# Altium PCB MachDoNuoc.PcbDoc
Units mil, origin at the board's own origin, x right, y up, seen from the top; angles counter-clockwise.
Board outline 3956.46 x 3078.74 mil, 2 copper layers (Top Layer, Bottom Layer); 15 components, 12 nets, 75 pads, 0 vias.
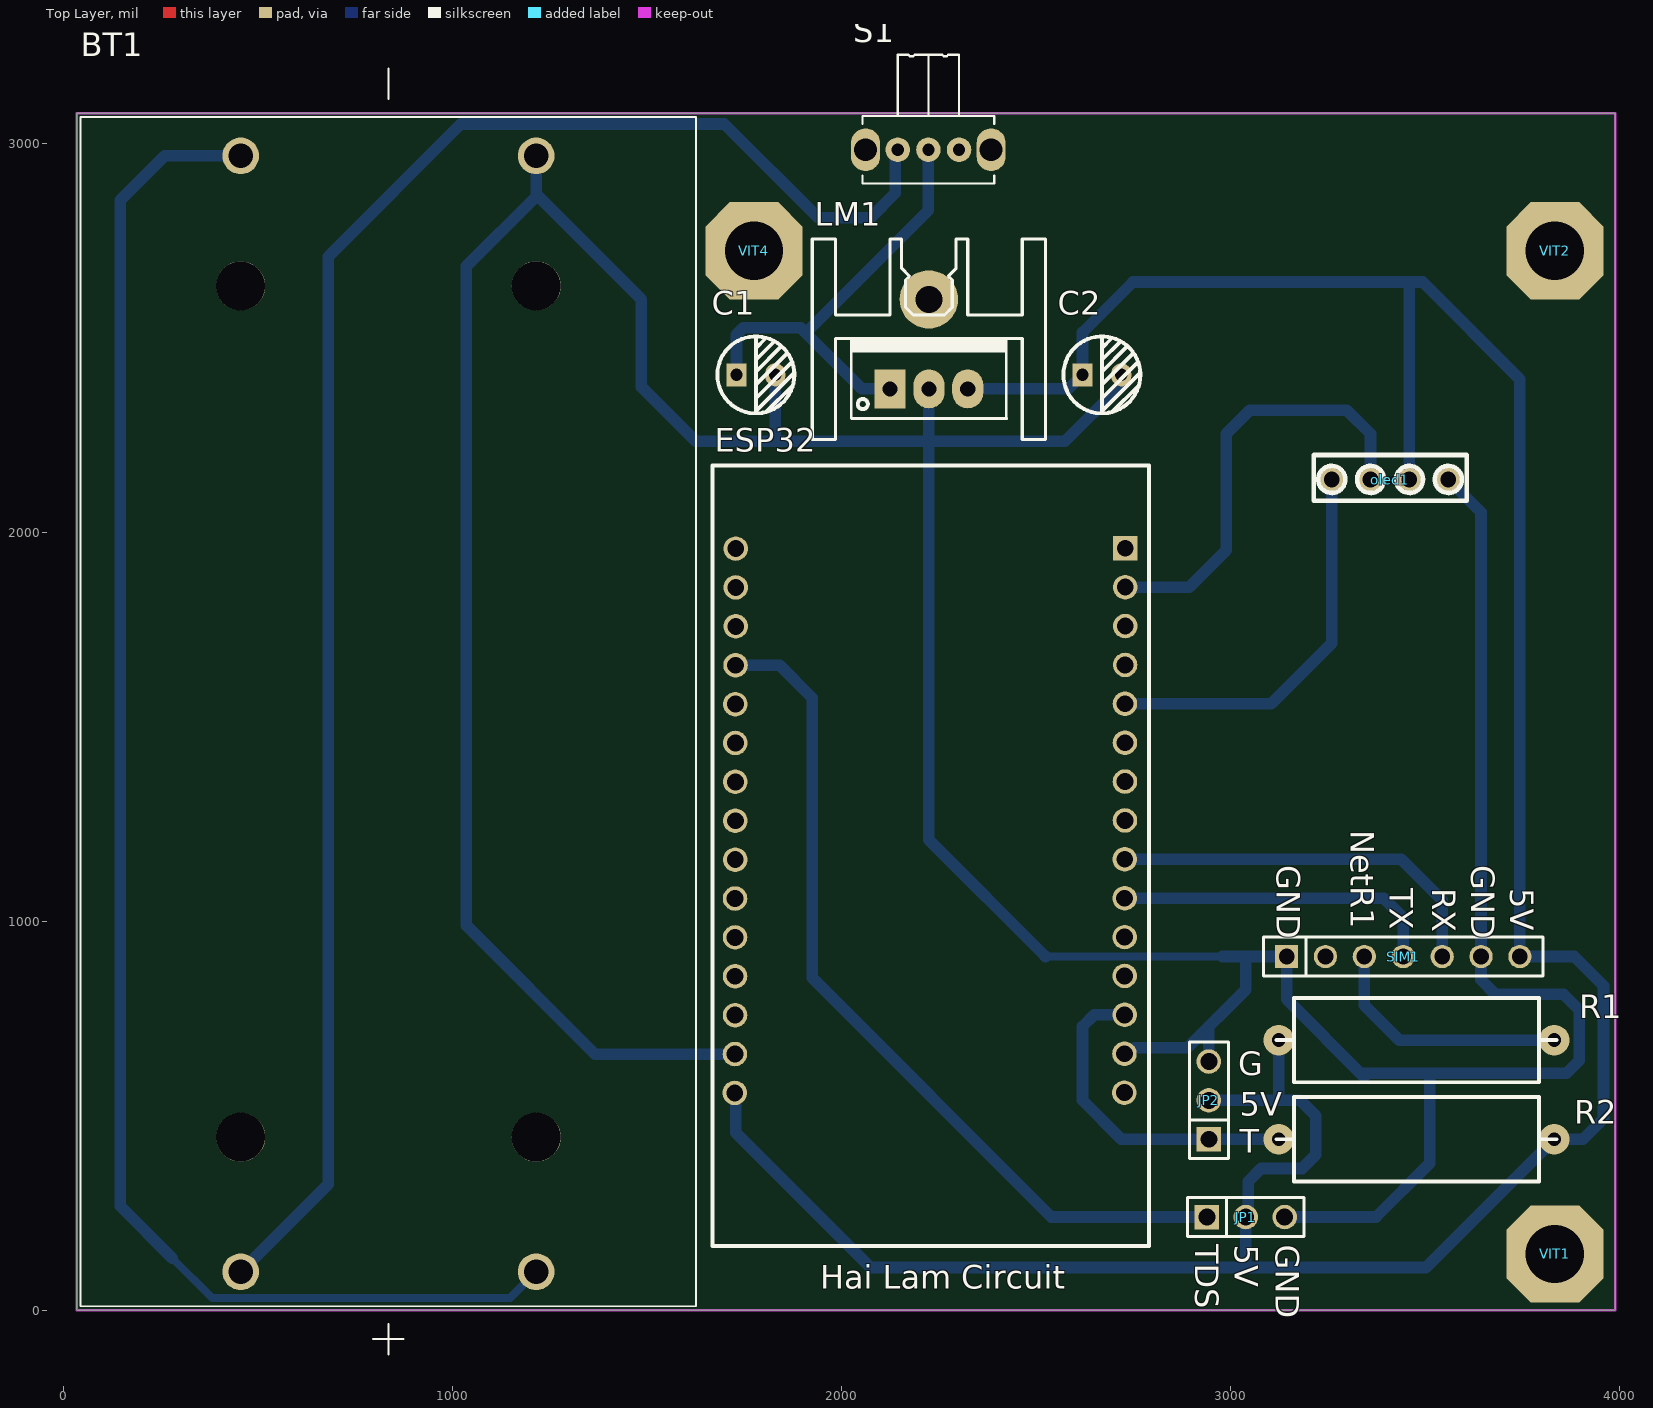
[diagram p0: Top Layer view]
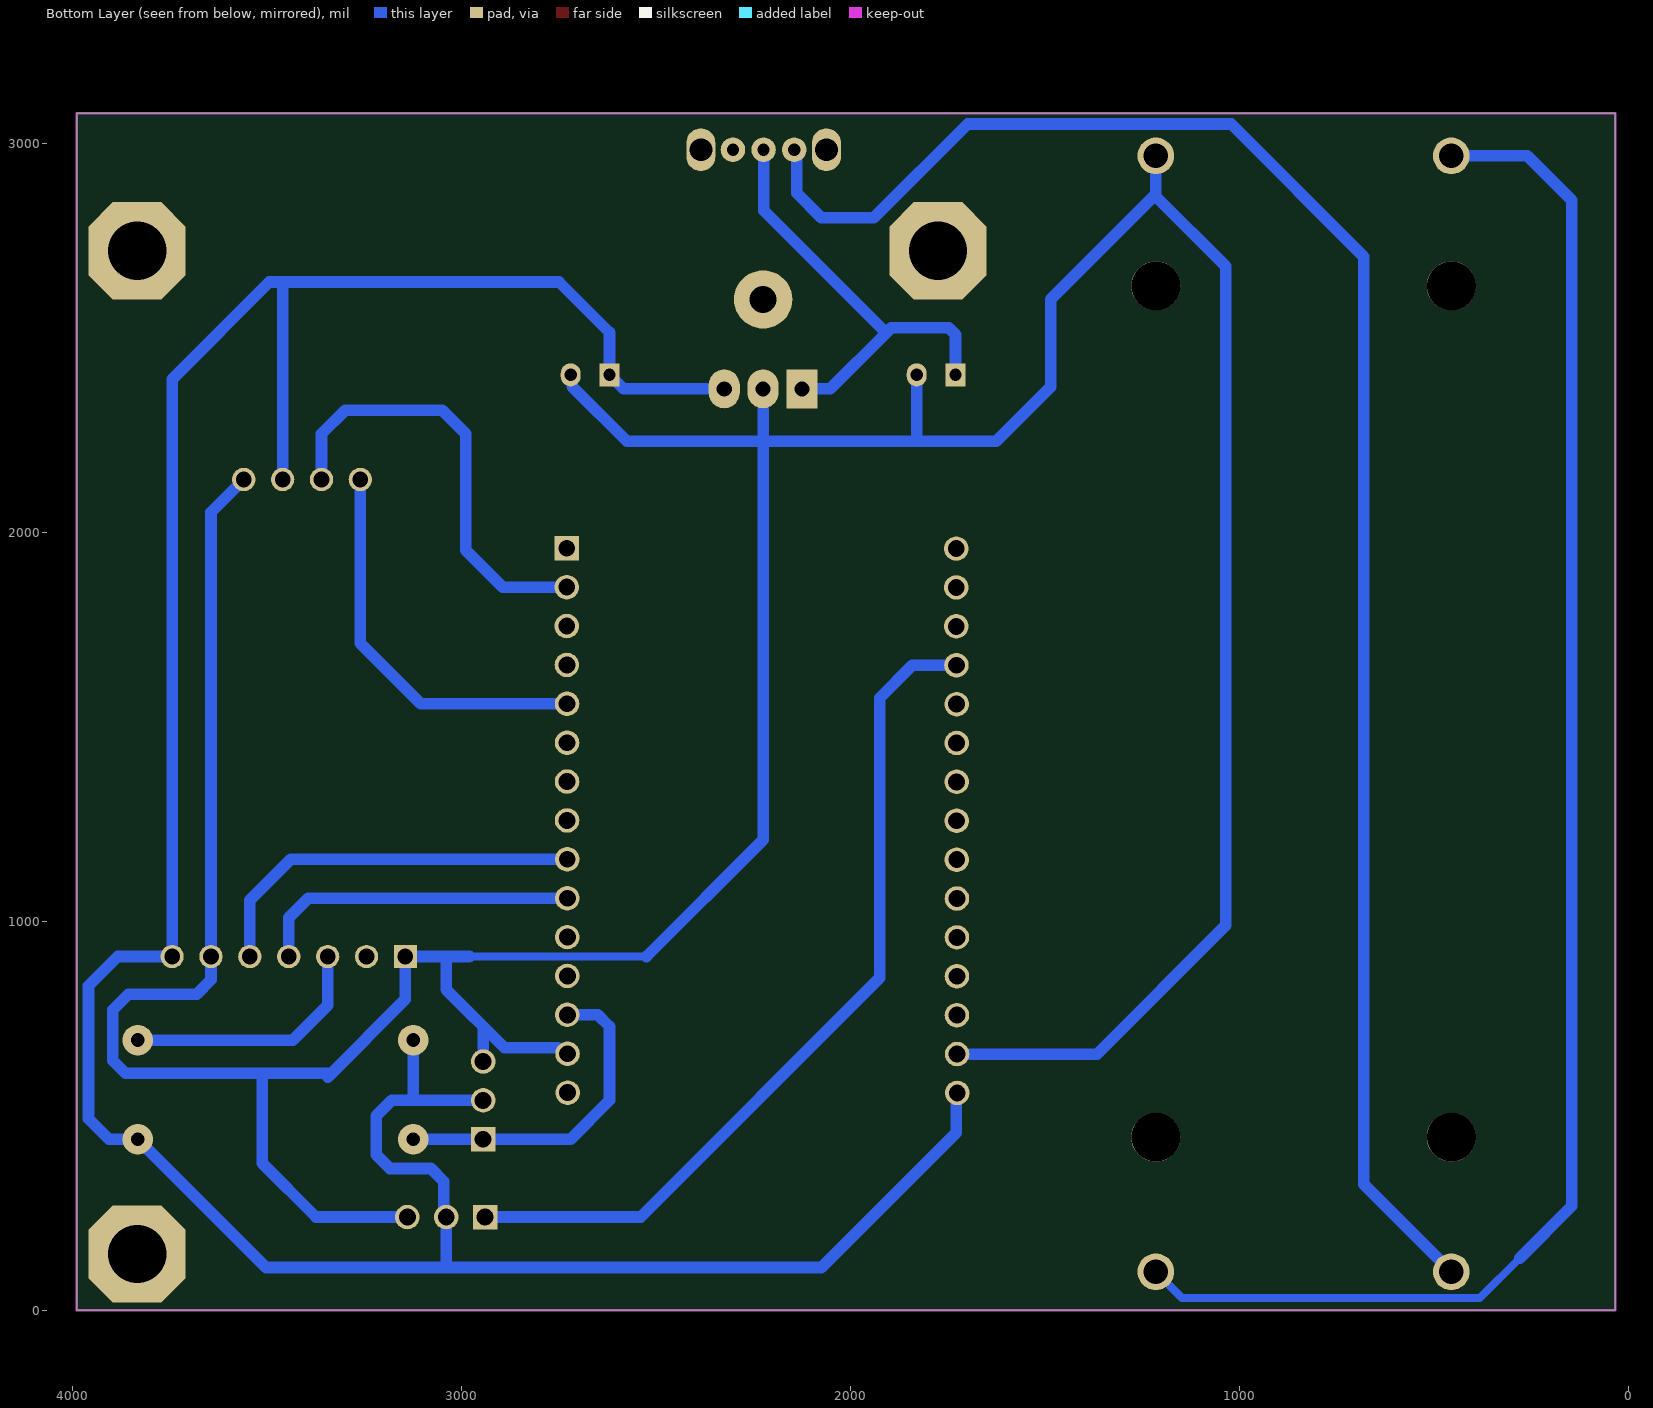
[diagram p1: Bottom Layer view, seen from below]
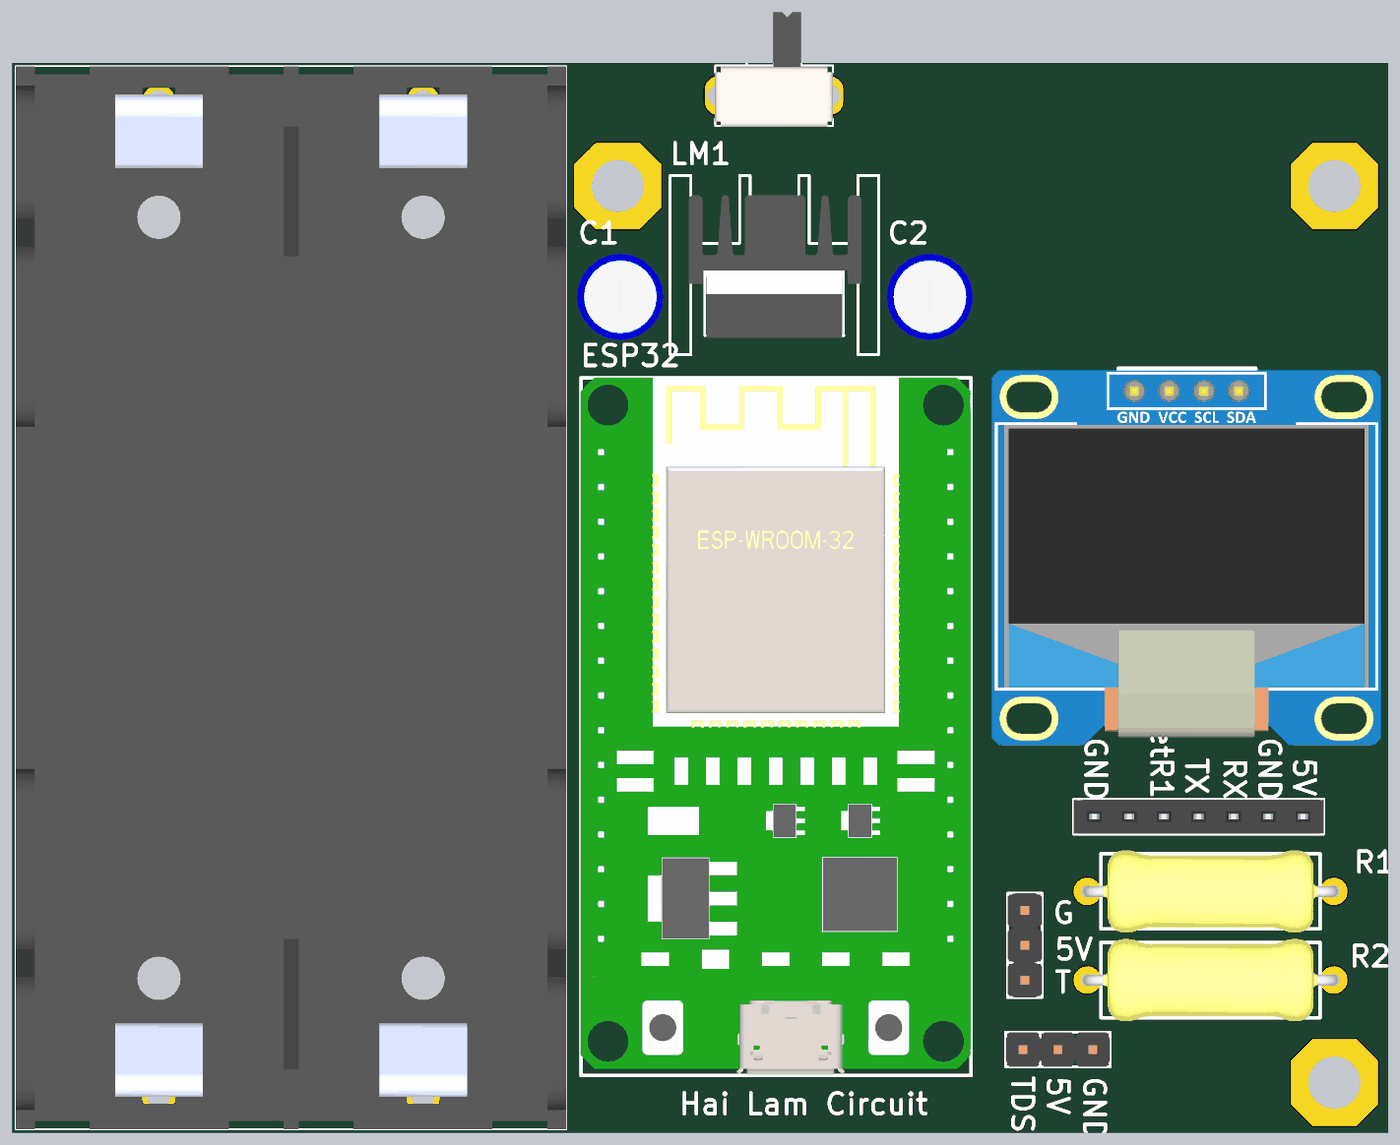
[diagram p2: 3D render of the assembled board from above, using the file's embedded part models]

## Layer stack, top to bottom
Top Solder: solder mask 0.4, Solder Resist, Dk 3.5
Top Layer: signal copper 1.4
Dielectric 1: dielectric 12.6, FR-4, Dk 4.8
Bottom Layer: signal copper 1.4
Bottom Solder: solder mask 0.4, Solder Resist, Dk 3.5

## Board outline
33.54,0.51 33.54,3079.25 3990,3079.25 3990,0.51

## Design rules (kind name [scope] priority, off if disabled: settings)
Clearance [All] p1: gap=10 ignorepadtopadclearanceinfootprint=FALSE except(0: Arc-Hole Track-Hole SMDPad-Hole THPad-Hole Via-Hole Fill-Hole Poly-Hole Region-Hole Text-Hole)
PolygonConnect [All] p1: connectstyle=Relief reliefconductorwidth=10 reliefentries=4 polygonreliefangle="90 Angle" airgapwidth=10
RoutingVias [All] p1: holewidth=28 width=50 viastyle="Through Hole" minholewidth=28 minwidth=50 maxholewidth=28 maxwidth=50
SolderMaskExpansion [All] p1: expansion=4 istentingtop=FALSE
Width [All] p1: maxlimit=30 minlimit=10 preferedwidth=20
30 further rules are at their usual default settings.

## Components (designator, comment, footprint, x,y, rotation, side; value= is the part's Value field where it differs from the comment)
BT1 "BK-18650-PC4" BAT_BK-18650-PC4 1626.82,10.52 r90 top
C1 "0.33uF" "tu hoa 5mm" 1780,2406.01 r0 top
C2 "0.1uF" "tu hoa 5mm" 2670,2406.01 r0 top
ESP32 "ESP32 Module 30GPIO" "ESP32 Module 30GPIO_v2" 2227.83,1259.61 r0 top
JP1 "JP 1x3 2.54" "JP 1x3 DT" 2940,240 r0 top
JP2 "JP 1x3 2.54" "JP 1x3 DT" 2945,440 r90 top
LM1 "LM7805" TO220H1 2225,2370 r0 top
oled1 "Module SSD1306" "Module SSD1306" 3510,1255 r270 top
R1 "10k" "tro vach 1w" 3478.93,695 r0 top
R2 "4.7k" "tro vach 1w" 3478.93,440 r0 top
S1 "Switch SPDT_Subminiator" "SPDT Subminiator" 2223.74,2985 r0 top
SIM1 "ModuleSimA7680C" "JP 1X7 CT" 3145,910 r0 top
VIT1 "1" "Screw octagon 3.81mm" 3835,145 r0 top
VIT2 "1" "Screw octagon 3.81mm" 3835,2725 r0 top
VIT4 "1" "Screw octagon 3.81mm" 1775,2725 r0 top

## Footprints (in the part's own frame and the unit in brackets; to place one, negate y for a bottom-side part, rotate by r counter-clockwise, add the part's x,y. Pads: shape width x height; smd on the part's side, far side on the other; paste and mask are expansions set on the pad)
BAT_BK-18650-PC4 [mm]
  round 2.4 hole 1.6: 1+(2.252,29.764) 1-(75.152,29.764) 2+(2.252,10.464) 2-(75.152,10.464)
  round 3.2 hole 3.2 unplated: ""(11.042,29.764) ""(11.042,10.464) ""(66.662,10.464) ""(66.662,29.764)
  silkscreen extent -3.15,0.01 80.85,40.22, body extent 0,0 77.7,40.21, height 21.62
"ESP32 Module 30GPIO_v2" [mm]
  rect 1.6x1.6 hole 1.1: 1(12.755,17.79)
  round 1.6 hole 1.1: 2(12.755,15.25) 3(12.755,12.71) 4(12.745,10.17) 5(12.735,7.63) 6(12.735,5.09) 7(12.735,2.55) 8(12.735,0.01) 9(12.725,-2.53) 10(12.715,-5.07) 11(12.715,-7.61) 12(12.715,-10.15) 13(12.715,-12.69) 14(12.705,-15.23) 15(12.695,-17.77) 16(-12.695,17.77) 17(-12.695,15.23) 18(-12.695,12.69) 19(-12.705,10.15) 20(-12.715,7.61) 21(-12.715,5.07) 22(-12.715,2.53) 23(-12.715,-0.01) 24(-12.725,-2.55) 25(-12.735,-5.09) 26(-12.735,-7.63) 27(-12.735,-10.17) 28(-12.735,-12.71) 29(-12.745,-15.25) 30(-12.755,-17.79)
  silkscreen extent -14.2,-27.8 14.3,23.2, body extent -14.22,-27.73 14.28,23.2, height 12.2
"JP 1x3 DT" [mm]
  rect 1.6x1.6 hole 1.1: 1(0,0)
  round 1.6 hole 1.1: 2(2.54,0) 3(5.08,0)
  silkscreen extent -1.27,-1.27 6.35,1.27, body extent -1.27,-1.27 6.35,1.27, height 8.54
"JP 1X7 CT" [mm] "7 row, straight, gold plating"
  rect 1.52x1.52 hole 1.02: 1(0,0)
  round 1.52 hole 1.02: 2(2.54,0) 3(5.08,0) 4(7.62,0) 5(10.16,0) 6(12.7,0) 7(15.24,0)
  silkscreen extent -1.52,-1.27 16.76,1.27, body extent -1.52,-1.25 16.76,1.25, height 8.51
"Module SSD1306" [mm]
  round 1.524 hole 1.02: 1(-22.4,1.29) 2(-22.4,-1.25) 3(-22.4,-3.79) 4(-22.4,-6.33)
  silkscreen extent -24,-7.5 -21,2.5, body extent -23.86,-16.74 3.54,11.66, height 10.5
"Screw octagon 3.81mm" [mil] "Screw hole 3.81mm"
  oct 250x250 hole 150: 1(0,0)
"SPDT Subminiator" [mm] "Subminiator SPDT switch"
  round 1.6 hole 0.8: 1(2,0) 2(0,0) 3(-2,0)
  oval 1.9x2.8 hole 1.5: M2(-4.1,0) M2(4.1,0)
  silkscreen extent -4.3,-2.2 4.3,6.2, body extent -4.31,-2.28 4.3,6.09, height 4.7
TO220H1 [mil] "TO-220 - 1-2-3"
  round 150 hole 70: 0(0,230)
  rect 80x100 hole 39: 1(-100,0)
  oval 80x100 hole 39: 2(0,0) 3(100,0)
  silkscreen extent -300,-130 300,385, body extent -246,-82 250,329, height 1000
"tro vach 1w" [mm]
  round 2 hole 0.9: 1(-9,0) 2(9,0)
  silkscreen extent -9.14,-2.75 9.14,2.75, body extent -9.29,-3 9.29,3, height 6.5
"tu hoa 5mm" [mm]
  rect 1.3x1.5 hole 0.8: 1(-1.27,0)
  oval 1.3x1.5 hole 0.8: 2(1.27,0)
  silkscreen extent -2.51,-2.51 2.51,2.51, body extent -3.12,-3.18 3.23,3.18, height 14.55

## Part data
BT1: "Battery Holder (Open) 18650 2 Cell PC Pin", Package=None, Availability=Unavailable, MP=BK-18650-PC4, Price=None
C1: library part "Tu Hoa 0.33uF 50V 5x11", "Cắm", Chung_Loai=Cắm, Don_Vi=Con, Ma_Hang=MH004655, So_Chan=2, Ten_Linh_Kien="Tụ Hóa 0.33uF 50V 5x11MM"
C2: library part "Tu Hoa 0.1uF 50V 5x11", "Cắm", Chung_Loai=Cắm, Don_Vi=Con, Ma_Hang=MH006853, So_Chan=2, Ten_Linh_Kien="Tụ Hóa 0.1uF 50V"
JP1 JP2: library part "JP 1x3 2.54 Duc Thang", "Cắm", Chung_Loai=Cắm, Don_Vi=Con, Ma_Hang=MH000903, Ten_Linh_Kien="Jump Đơn Đực 2.54MM 1x40P Thẳng 11MM"
LM1: library part LM78xx, "IC REG LDO 5V 1A TO220-3"
R1: library part "Tro Vach 1W 5% 10k", "Cắm", Chung_Loai=Cắm, Don_Vi=Con, Ma_Hang=MH006391, So_Chan=2, Ten_Linh_Kien="Trở 5% 1w 10k"
R2: library part "Tro Vach 1W 5% 4.7k", "Cắm", Chung_Loai=Cắm, Don_Vi=Con, Ma_Hang=MH006407, So_Chan=2, Ten_Linh_Kien="Trở 5% 1w 4.7k"
S1: "Subminiator SPDT Switch", Company=E.P.I.L, Design date=2011/11/02
VIT1 VIT2 VIT4: library part VIT, "Vit xuyen lo", Chung_Loai=Cắm, Don_Vi=Con, Ma_Hang=MH002051, Ten_Linh_Kien="CON 2 KF142R 5.08MM"

## Nets (pads, with @x,y where several pads share a name; then routed paths per layer and width w, separated by ;. In a path a pad name is that pad's centre, name@x,y a point inside that pad or via, vN(x,y) a via of type N, cw(c..) or ccw(c..) an arc to the next point about the centre after c; other vN are vias at no path point)
+5: C2.1 ESP32.30 JP1.2 JP2.2 LM1.3 oled1.2 R1.1 R2.2 SIM1.7 | length 7894
  Bottom Layer w30: ESP32.30@1728.43,558.82 1728.43,456.57 2075,110 3040,110 ; LM1.3 2583.99,2370 2605.47,2391.49 2609.41,2391.49 2620,2402.08 C2.1 2620,2515 2750,2645 3461.53,2645 ; JP2.2 3124.6,540 ; R1.1 3124.6,540 ; oled1.2 3460.79,2644.25 3461.53,2645 ; 3040,110 3503.26,110 R2.2 3907.43,440 3960,492.57 3960,835 3885,910 SIM1.7 3745,2395 3495,2645 3461.53,2645 ; 3040,110 JP1.2 3046.31,246.31 3046.31,331.31 3080,365 3185,365 3220,400 3220,500 3180,540 3124.6,540
GND: BT1.2- C1.2 C2.2 ESP32.14 ESP32.29 JP1.3 JP2.3 LM1.2 oled1.1 SIM1.1 SIM1.6 | length 11156.6
  Bottom Layer w20: 2525,910 2980,910
  Bottom Layer w30: 1214.84,2864.84 1035,2685 1035,990 1366.18,658.82 ESP32.29@1728.43,658.82 ; BT1.2- 1214.84,2870.16 1485,2600 1485,2375 1625,2235 1825,2235 ; C1.2 1830,2240 1825,2235 ; LM1.2 2225,2235 ; 2525,910 2225,1210 2225,2235 ; C2.2 2715.95,2401.96 2715.95,2375.95 2575,2235 2225,2235 ; ESP32.14@2730,660 2738.12,660 2753.12,675 2890,675 3040,825 ; JP2.3 2945,725.76 ; 2980,910 3039.01,910 ; 3040,828 3040,909.01 3039.01,910 ; JP1.3 3375,240 3513.21,378.21 3513.21,610 ; oled1.1 3645,2052.68 3645,850 3682.02,812.98 3857.02,812.98 3897.63,772.37 3897.63,642.63 3865,610 3513.21,610 ; 1825,2235 2225,2235 ; 3039.01,910 SIM1.1 3145,800 3345,600 3345,610 3513.21,610
NetBT1_1+: BT1.1+ S1.3 | length 4544.3
  Bottom Layer w30: BT1.1+ 680,324.17 680,2710 1021.26,3051.26 1698.74,3051.26 1940,2810 2075,2810 2138.69,2873.69 2138.69,2978.69 S1.3
NetBT1_1-: BT1.1- BT1.2+ | length 4139.5
  Bottom Layer w20: 279.25,134.25 381.57,31.93 1147.6,31.93 BT1.2+
  Bottom Layer w30: 279.25,134.25 145,268.5 145,2855 259.25,2969.25 BT1.1-
NetC1_1: C1.1 LM1.1 S1.2 | length 1171.4
  Bottom Layer w30: C1.1 1730,2509.52 1747.57,2527.09 1895.41,2527.09 1908.75,2513.75 ; LM1.1 2052.5,2370 1908.75,2513.75 ; S1.2@2223.74,2983.84 2223.74,2828.74 1908.75,2513.75
NetR1_2: R1.2 SIM1.3 | length 650.5
  Bottom Layer w30: SIM1.3 3345,785 3435,695 R1.2
RX: ESP32.9 SIM1.5 | length 1003.5
  Bottom Layer w30: ESP32.9@2730,1160 3440,1160 3545,1055 SIM1.5
SCL: ESP32.2 oled1.3 | length 1137.5
  Bottom Layer w30: ESP32.2 2895,1860 2990,1955 2990,2255 3050,2315 3300,2315 3360.79,2254.21 oled1.3
SDA: ESP32.5 oled1.4 | length 1016.4
  Bottom Layer w30: ESP32.5@2730,1560 3105,1560 3260.79,1715.79 oled1.4
TDS: ESP32.19 JP1.1 | length 2221
  Bottom Layer w30: ESP32.19@1728.43,1658.82 1841.18,1658.82 1925,1575 1925,855 2540,240 JP1.1
Temp: ESP32.13 JP2.1 R2.1 | length 858.4
  Bottom Layer w30: ESP32.13@2730,760 2650,760 2620,730 2620,540 2720,440 JP2.1 R2.1
TX: ESP32.10 SIM1.4 | length 835.7
  Bottom Layer w30: ESP32.10@2730,1060 3395,1060 3445,1010 SIM1.4
pads on no net: BT1. ESP32.1 ESP32.3 ESP32.4 ESP32.6 ESP32.7 ESP32.8 ESP32.11 ESP32.12 ESP32.15 ESP32.16 ESP32.17 ESP32.18 ESP32.20 ESP32.21 ESP32.22 ESP32.23 ESP32.24 ESP32.25 ESP32.26 ESP32.27 ESP32.28 LM1.0 S1.1 S1.M2 SIM1.2 VIT1.1 VIT2.1 VIT4.1

## Keep-outs
Keep-Out Layer:
  the board outline again, w5.98

## Silkscreen, mask and mechanical layers (free items; w line width, h text height)
Top Overlay:
  text "NetR1" at 3310,1235 h60 r270
  text "GND" at 3120,1145.03 h60 r270
  text "GND" at 3620,1145.03 h60 r270
  text "TX" at 3410,1085.05 h60 r270
  text "RX" at 3520,1085.05 h60 r270
  text "5V" at 3720,1085.05 h60 r270
  text "G" at 3020,605 h60
  text "5V" at 3025,500 h60
  text "T" at 3025,405 h60
  text "TDS" at 2910,170 h60 r270
  text "5V" at 3011.55,168.45 h60 r270
  text "GND" at 3116.55,168.45 h60 r270
  text "Hai Lam Circuit" at 1945,55 h60

## Dimensions
33.54,3079.25 to 3990,3079.25 on Multi-Layer
33.54,3079.25 to 33.54,0.51 on Multi-Layer